# Altium PCB DnDBopIt.PcbDoc
Units mil, origin at the board's own origin, x right, y up, seen from the top; angles counter-clockwise.
Board outline 2935 x 2635 mil, 2 copper layers (Top Layer, Bottom Layer); 33 components, 35 nets, 131 pads, 0 vias.
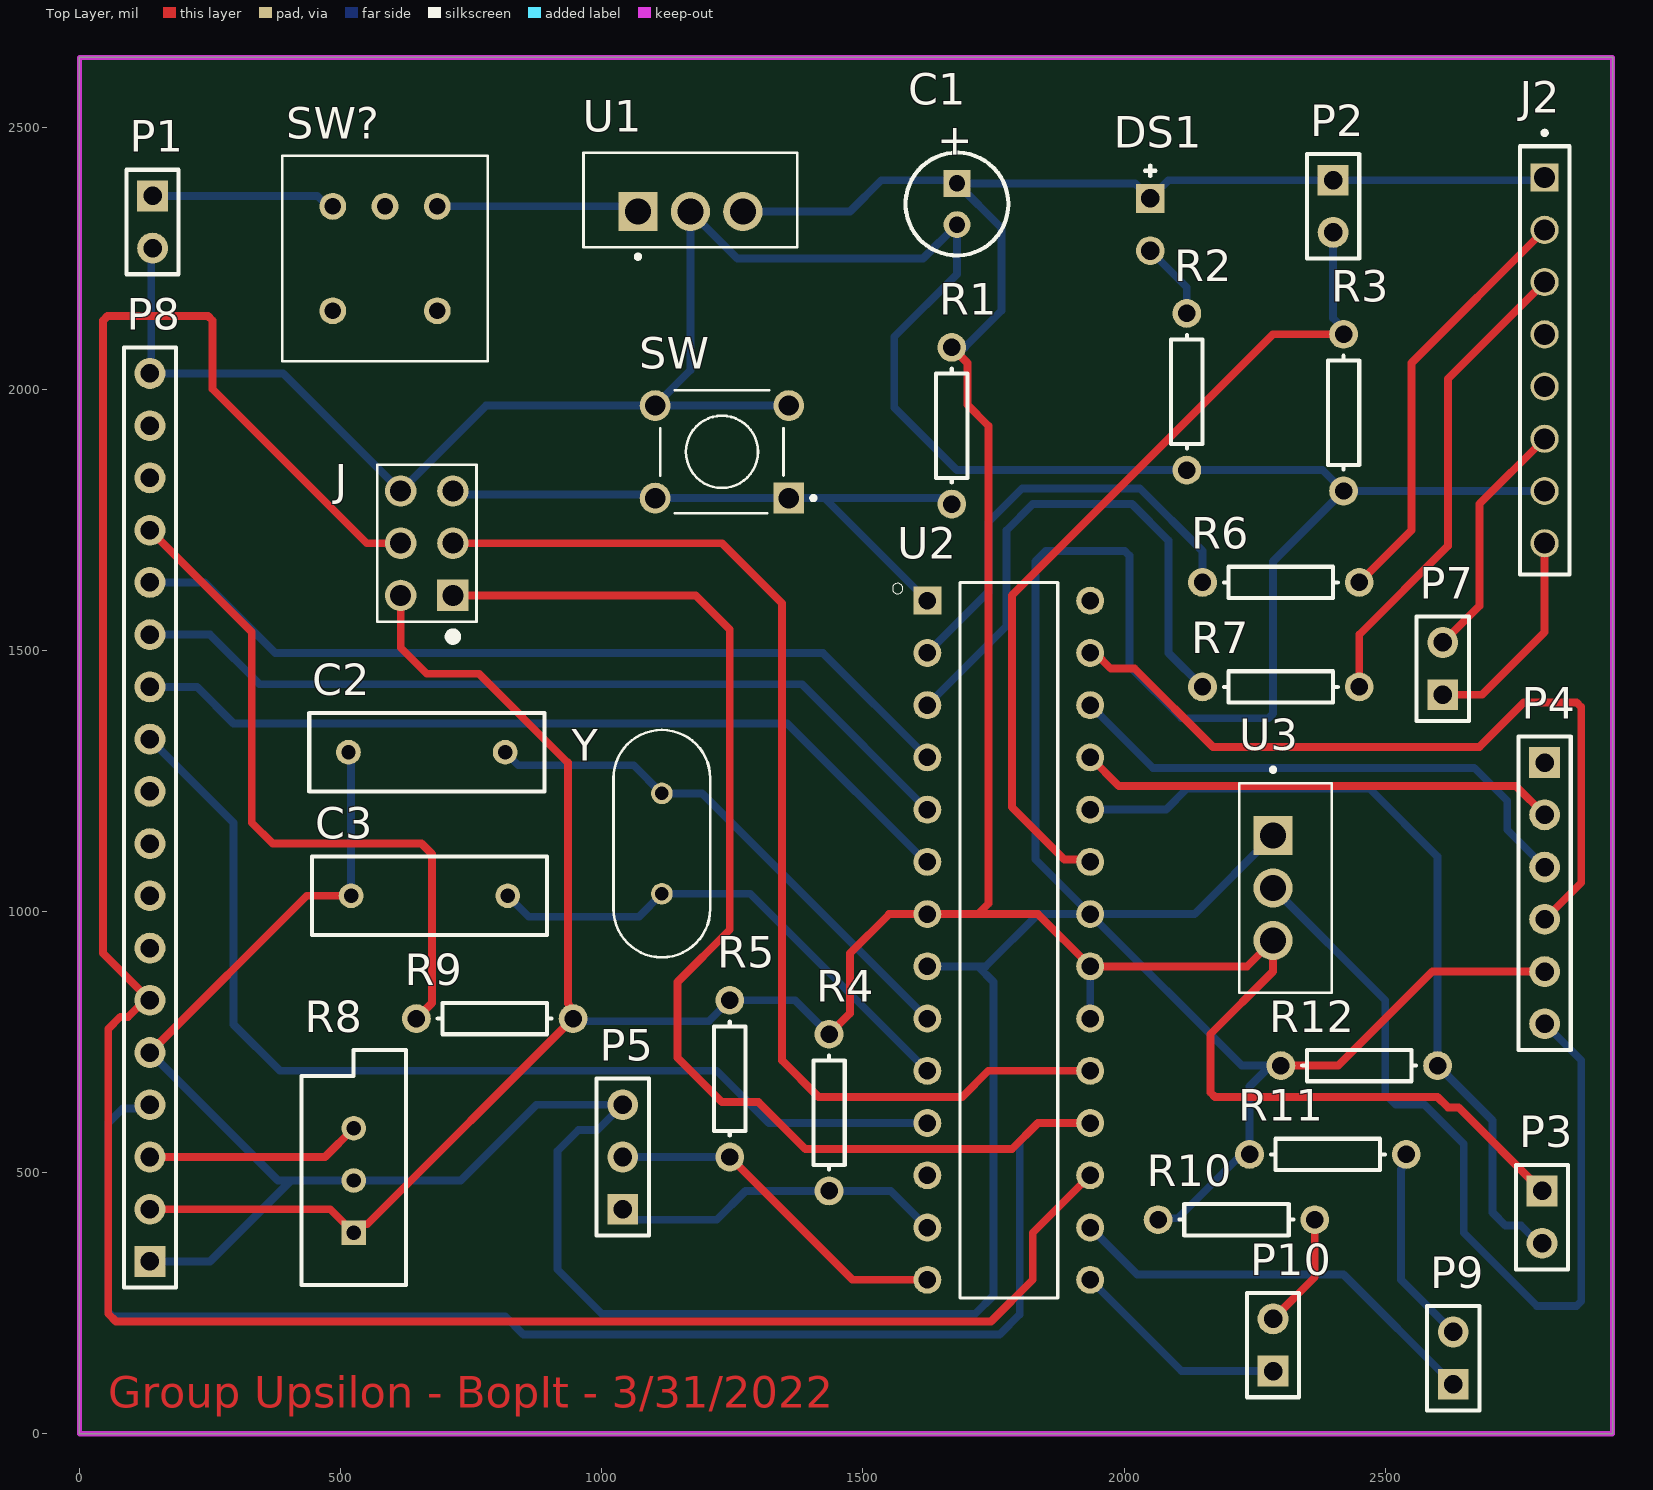
[diagram p0: Top Layer view]
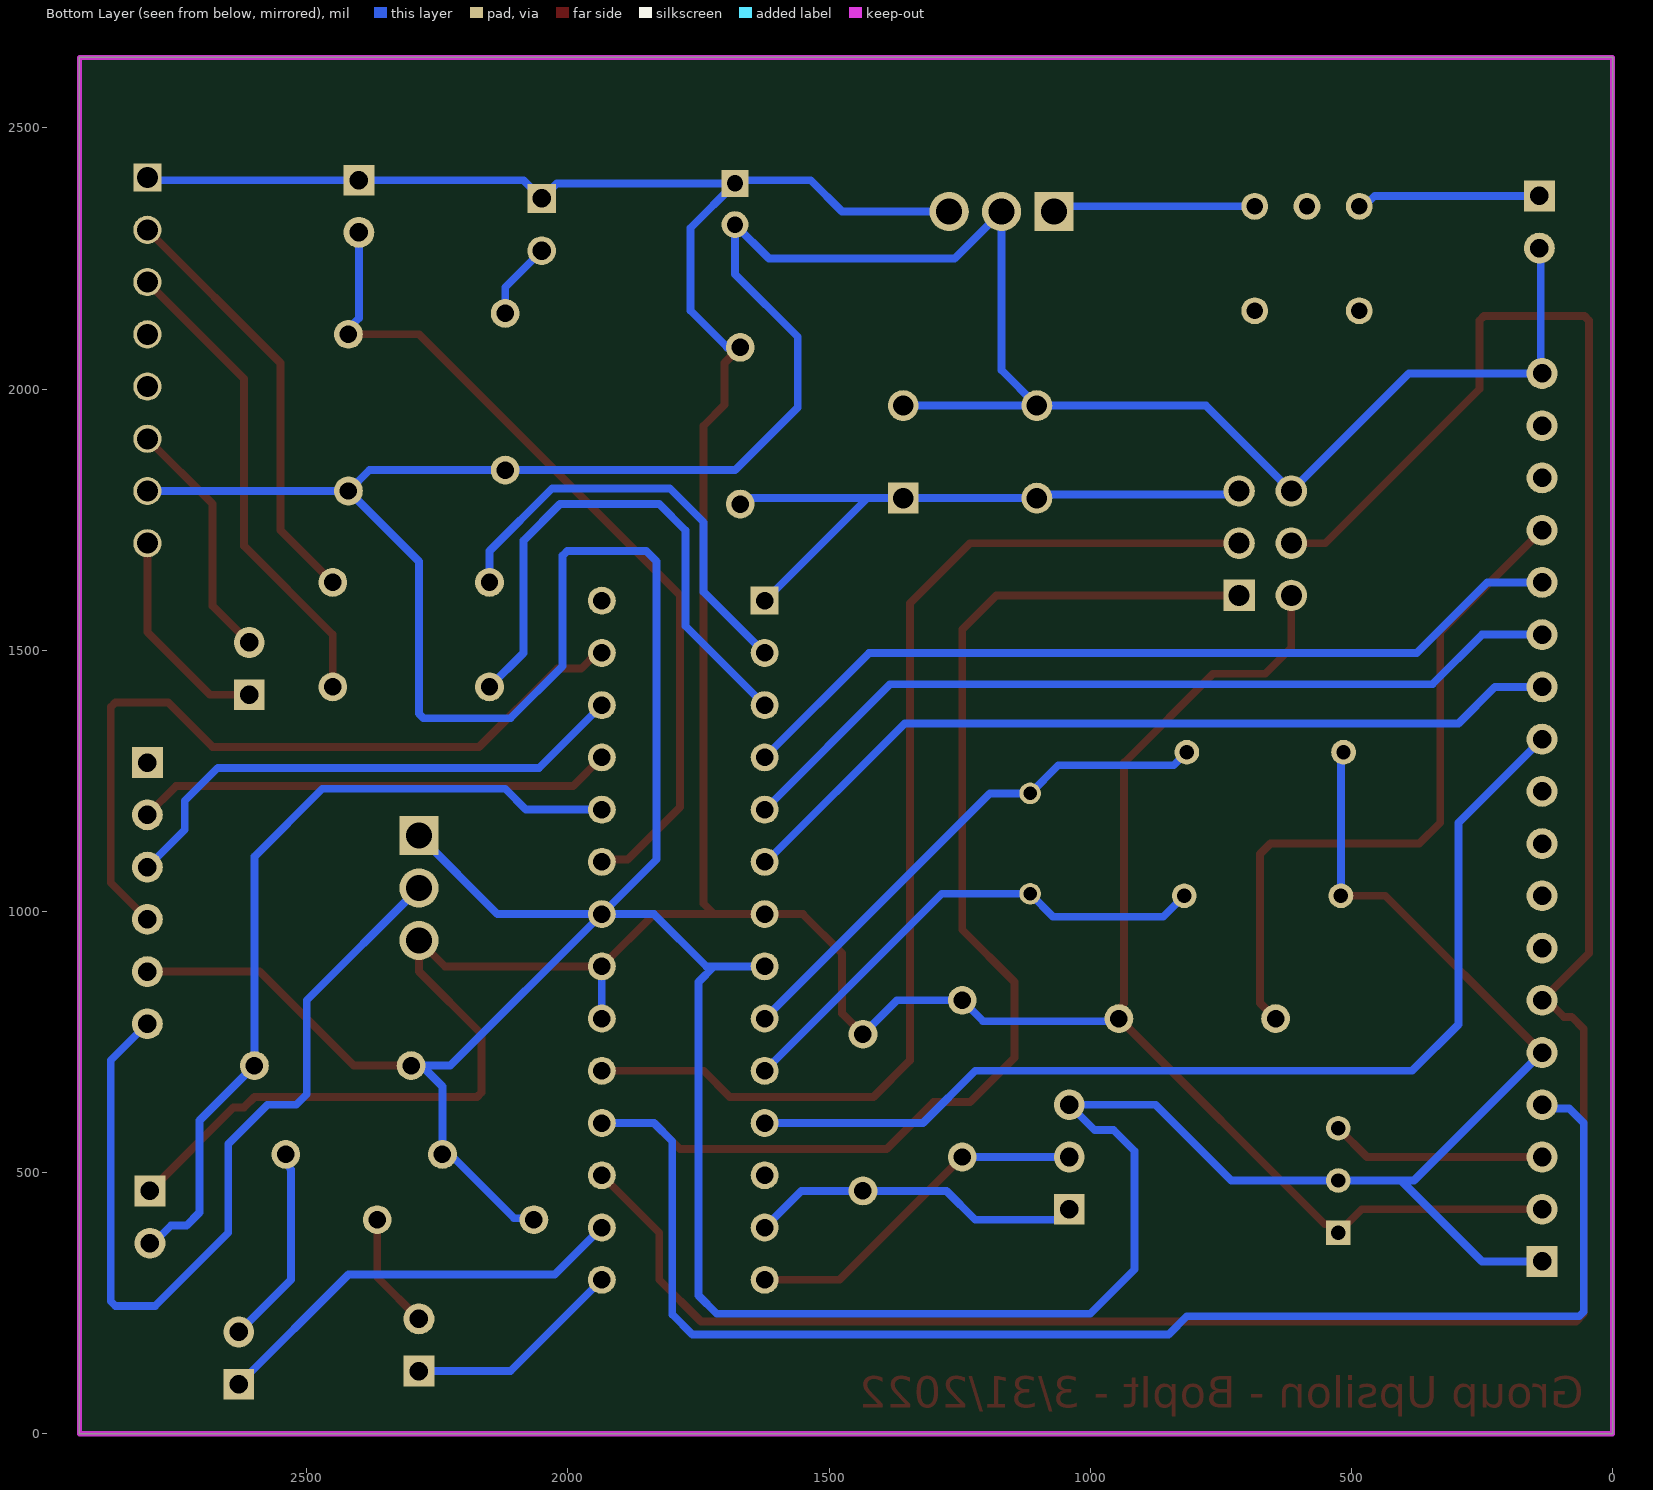
[diagram p1: Bottom Layer view, seen from below]

## Layer stack, top to bottom
Top Solder: solder mask 0.4, Solder Resist, Dk 3.5
Top Layer: signal copper 1.4
Dielectric 1: dielectric 12.6, FR-4, Dk 4.8
Bottom Layer: signal copper 1.4
Bottom Solder: solder mask 0.4, Solder Resist, Dk 3.5

## Board outline
0,0 2935,0 2935,2635 0,2635

## Design rules (kind name [scope] priority, off if disabled: settings)
BoardOutlineClearance [All] p1: gap=7.87 ignorepadtopadclearanceinfootprint=FALSE except(15.75: Arc-SplitBarrior Arc-SplitContinuation Track-SplitBarrior Track-SplitContinuation SMDPad-SplitBarrior SMDPad-SplitContinuation THPad-SplitBarrior THPad-SplitContinuation Via-SplitBarrior Via-SplitContinuation Fill-SplitBarrior Fill-SplitContinuation Poly-SplitBarrior Poly-SplitContinuation Region-SplitBarrior Region-SplitContinuation Text-SplitBarrior Text-SplitContinuation)
Clearance "Clearance Bottom Layer" [OnLayer('Bottom Layer')] p1: gap=8 ignorepadtopadclearanceinfootprint=TRUE except(10: Arc-Text Track-Text SMDPad-Text THPad-Text Via-Text Fill-Text Poly-Text Region-Text Text-Text)
Clearance "Clearance Top Layer" [OnLayer('Top Layer')] p2: gap=8 ignorepadtopadclearanceinfootprint=TRUE except(10: Arc-Text Track-Text SMDPad-Text THPad-Text Via-Text Fill-Text Poly-Text Region-Text Text-Text)
Clearance [All] p3: gap=7.87 ignorepadtopadclearanceinfootprint=FALSE except(3.5: Arc-Arc Arc-Track Arc-SMDPad Track-Track Track-SMDPad SMDPad-SMDPad; 5: Arc-Via Track-Via SMDPad-Via THPad-Via Via-Via; 10: Arc-Text Track-Text SMDPad-Text THPad-Text Via-Text Fill-Text Poly-Text Region-Text Text-Text)
HoleSize [All] p1: absolutevalues=TRUE maxlimit=248.03 minlimit=7.87 maxpercent=80.000 minpercent=20.000
MinimumAnnularRing [All] p1: minimumring=3
MinimumSolderMaskSliver [All] p1: minsoldermaskwidth=3.94
PolygonConnect PolygonConnect_1 [All] p1: thpad.connectstyle=Relief thpad.reliefconductorwidth=20 thpad.reliefentries=4 thpad.polygonreliefangle="90 Angle" thpad.airgapwidth=10 smdpad.connectstyle=Relief smdpad.reliefconductorwidth=20 smdpad.reliefentries=4 smdpad.polygonreliefangle="90 Angle" smdpad.airgapwidth=10 via.connectstyle=Direct via.reliefconductorwidth=20 via.reliefentries=4 via.polygonreliefangle="90 Angle" via.airgapwidth=10
RoutingCorners [All] p1: cornerstyle=Round minsetback=100 maxsetback=100
RoutingVias [All] p1: holewidth=19.68 width=39.37 viastyle="Through Hole" minholewidth=7.87 minwidth=17.72 maxholewidth=39.37 maxwidth=78.74
SilkToSilkClearance [All] p1: silktosilkclearance=3.94
SilkToSolderMaskClearance [IsPad] p1: minsilkscreentomaskgap=3.94 clearancetoexposedcopper=TRUE
SolderMaskExpansion [All] p1: expansion=4 istentingtop=FALSE
Width [All] p1: maxlimit=100 minlimit=3.5 preferedwidth=15
25 further rules are at their usual default settings.

## Components (designator, comment, footprint, x,y, rotation, side; value= is the part's Value field where it differs from the comment)
C1 "ECA1HM100" CAPPR55-200-1100X500X1200 1680,2354.37 r270 top value=10µF
C2 "" RAD-0.3 665,1305 r0 top value=22pF
C3 "" RAD-0.3 670,1030 r0 top value=22pF
DS1 "LTL-1CHG" LTST-LTL-1CHG-2 2050,2315 r270 top
J "67997-206HLF" FRAMATOME_67997-206HLF 665,1705 r90 top
J2 "ESQ-108-12-G-S" SAMTEC_ESQ-108-12-G-S 2805,2405 r270 top
P1 "Header 2" HDR1X2 140,2370 r270 top
P2 "Header 2" HDR1X2 2400,2400 r270 top
P3 "Header 2" HDR1X2 2800,465 r270 top
P4 "Header 6" HDR1X6 2805,1285 r270 top
P5 "Header 3" HDR1X3 1040,430 r90 top
P7 "Header 2" HDR1X2 2610,1415 r90 top
P8 "Header 18" HDR1X18 135,330 r90 top
P9 "Header 2" HDR1X2 2630,95 r90 top
P10 "Header 2" HDR1X2 2285,120 r90 top
R1 "Res1" AXIAL-0.3 1670,1930 r90 top value=10K
R2 "Res1" AXIAL-0.3 2120,1995 r270 top value=220
R3 "Res1" AXIAL-0.3 2420,1955 r270 top value=220
R4 "Res1" AXIAL-0.3 1435,615 r90 top value=10K
R5 "Res1" AXIAL-0.3 1245,680 r90 top value=10K
R6 "Res1" AXIAL-0.3 2300,1630 r0 top value=1K
R7 "Res1" AXIAL-0.3 2300,1430 r0 top value=1K
R8 "RPot" VR5 525,485 r90 top value=10K
R9 "Res1" AXIAL-0.3 795,795 r0 top value=220
R10 "Res1" AXIAL-0.3 2215,410 r0 top value=220
R11 "Res1" AXIAL-0.3 2390,535 r0 top value=220
R12 "Res1" AXIAL-0.3 2450,705 r0 top value=220
SW "" SW_1825910-6-4 1230,1880 r180 top
SW? "AS11CH" AS11CH 585,2250 r0 top
U1 "L7805CV" TO255P1040X460X1968-3 1069.21,2340 r0 top
U2 "ATMEGA328P-PU" DIP794W46P254L2967H457Q28B 1779.09,945 r0 top
U3 "LD1117AV33" TO255P1020X450X1968-3 2285,1145.39 r270 top
Y "LFXT" HC49P488W45L1105T470H410 1115,1130 r270 top

## Footprints (in the part's own frame and the unit in brackets; to place one, negate y for a bottom-side part, rotate by r counter-clockwise, add the part's x,y. Pads: shape width x height; smd on the part's side, far side on the other; paste and mask are expansions set on the pad)
AS11CH [mm]
  round 1.308 hole 0.8: 1(-2.54,2.54) 2(0,2.54) 3(2.54,2.54) M1(-2.54,-2.54) M2(2.54,-2.54)
  silkscreen extent -5,-5 5,5
AXIAL-0.3 [mm] "Axial Device, Thru-Hole; 2 Leads; 0.3 in Pin Spacing"
  round 1.4 hole 0.85: 1(-3.81,0) 2(3.81,0)
  silkscreen extent -2.77,-0.76 2.77,0.76
CAPPR55-200-1100X500X1200 [mm] "THD, 2-Leads, Dia 5mm, Pin Spacing 2mm"
  rect 1.3x1.3 hole 0.8: 1(-1,0)
  round 1.3 hole 0.8: 2(1,0)
  silkscreen extent -2.5,-2.5 2.5,2.5, body extent -2.5,-2.5 2.45,2.5, height 12
DIP794W46P254L2967H457Q28B [mm]
  rect 1.358x1.358 hole 0.85: 1(-3.96,16.51)
  round 1.358 hole 0.85: 2(-3.96,13.97) 3(-3.96,11.43) 4(-3.96,8.89) 5(-3.96,6.35) 6(-3.96,3.81) 7(-3.96,1.27) 8(-3.96,-1.27) 9(-3.96,-3.81) 10(-3.96,-6.35) 11(-3.96,-8.89) 12(-3.96,-11.43) 13(-3.96,-13.97) 14(-3.96,-16.51) 15(3.96,-16.51) 16(3.96,-13.97) 17(3.96,-11.43) 18(3.96,-8.89) 19(3.96,-6.35) 20(3.96,-3.81) 21(3.96,-1.27) 22(3.96,1.27) 23(3.96,3.81) 24(3.96,6.35) 25(3.96,8.89) 26(3.96,11.43) 27(3.96,13.97) 28(3.96,16.51)
  silkscreen extent -5.65,-17.4 2.38,17.4
FRAMATOME_67997-206HLF [mm]
  rect 1.53x1.53 hole 1.02: 1(-2.54,-1.27)
  round 1.53 hole 1.02: 2(-2.54,1.27) 3(0,-1.27) 4(0,1.27) 5(2.54,-1.27) 6(2.54,1.27)
  silkscreen extent -4.74,-2.41 3.81,2.41
HC49P488W45L1105T470H410 [mm]
  round 1.05 hole 0.65: 1(-2.44,0) 2(2.44,0)
  silkscreen extent -5.53,-2.35 5.53,2.35
HDR1X2 [mm] "Connector; Header; 2 Position"
  rect 1.5x1.5 hole 0.9: 1(0,0)
  round 1.5 hole 0.9: 2(2.54,0)
  silkscreen extent -1.27,-1.27 3.81,1.27
HDR1X3 [mm] "Connector; Header; 3 Position"
  rect 1.5x1.5 hole 0.9: 1(0,0)
  round 1.5 hole 0.9: 2(2.54,0) 3(5.08,0)
  silkscreen extent -1.27,-1.27 6.35,1.27
HDR1X6 [mm] "Connector; Header; 6 Position"
  rect 1.5x1.5 hole 0.9: 1(0,0)
  round 1.5 hole 0.9: 2(2.54,0) 3(5.08,0) 4(7.62,0) 5(10.16,0) 6(12.7,0)
  silkscreen extent -1.27,-1.27 13.97,1.27
HDR1X18 [mm] "Connector; Header; 18 Position"
  rect 1.5x1.5 hole 0.9: 1(0,0)
  round 1.5 hole 0.9: 2(2.54,0) 3(5.08,0) 4(7.62,0) 5(10.16,0) 6(12.7,0) 7(15.24,0) 8(17.78,0) 9(20.32,0) 10(22.86,0) 11(25.4,0) 12(27.94,0) 13(30.48,0) 14(33.02,0) 15(35.56,0) 16(38.1,0) 17(40.64,0) 18(43.18,0)
  silkscreen extent -1.27,-1.27 44.45,1.27
LTST-LTL-1CHG-2 [mm] "TH, 2-Leads, Dia 3.8mm"
  rect 1.4x1.4 hole 0.9: 1(-1.27,0)
  round 1.4 hole 0.9: 2(1.27,0)
  silkscreen extent -2.87,-0.25 -2.37,0.25, body extent -1.9,-1.9 1.9,1.9, height 6.5
RAD-0.3 [mm] "Radial Cap, Thru-Hole; 2 Leads; 0.3 in Pin Spacing"
  round 1.2 hole 0.7: 1(-3.81,0) 2(3.81,0)
  silkscreen extent -5.71,-1.91 5.71,1.91
SAMTEC_ESQ-108-12-G-S [mm]
  rect 1.37x1.37 hole 1.02: 01(0,0)
  round 1.37 hole 1.02: 02(2.54,0) 03(5.08,0) 04(7.62,0) 05(10.16,0) 06(12.7,0) 07(15.24,0) 08(17.78,0)
  silkscreen extent -2.27,-1.2 19.31,1.2
SW_1825910-6-4 [mm]
  rect 1.498x1.498 hole 0.99: 1(-3.25,2.25)
  round 1.498 hole 0.99: 2(3.25,2.25) 3(-3.25,-2.25) 4(3.25,-2.25)
  silkscreen extent -4.54,-3 3,3
TO255P1020X450X1968-3 [mm]
  rect 1.91x1.91 hole 1.27: 1(0,0)
  round 1.91 hole 1.27: 2(2.55,0) 3(5.1,0)
  silkscreen extent -3.3,-1.64 7.65,2.86
TO255P1040X460X1968-3 [mm]
  rect 1.91x1.91 hole 1.27: 1(0,0)
  round 1.91 hole 1.27: 2(2.55,0) 3(5.1,0)
  silkscreen extent -2.65,-2.29 7.75,2.86
VR5 [mm] "Thru-Hole; 3 Leads"
  rect 1.2x1.2 hole 0.7: 1(-2.54,0)
  round 1.2 hole 0.7: 2(0,0) 3(2.54,0)
  silkscreen extent -5.08,-2.54 6.35,2.54

## Part data
C1: library part CMP-001-00025-5, "Aluminum Electrolytic Capacitor, 10 uF, +/- 20%, 50 V, -40 to 85 degC, 2-Pin THD, RoHS, Bulk", Capacitor Type=Electrolytic, Case/Package=Radial, Manufacturer=Panasonic, Max Operating Temperature=85°C, Min Operating Temperature=-40°C, Package Description="2-Pin Radial Lead, Dia 5 mm, Height 12 mm", Package Quantity=200, Package Reference=CAPPR55-200-1100X500X1200, Ripple Current=65mA, Tolerance=20%, Voltage Rating=50V, Datasheet URL=https://industrial.panasonic.com/cdbs/www-data/pdf/RDF0000/ABA0000C1218.pdf, Datasheet Version="Rev. 05, 10/2016", Diameter=5mm, Lead Pitch=2mm, Manufacturer URL=http://www.panasonic.com/, Mounting Technology=TH, Packaging=Bulk, Pins=2, Ripple Current (AC)=65mA, RoHS Compliant=True
C2 C3: library part Cap, "Capacitor", LatestRevisionDate=17-Jul-2002, LatestRevisionNote="Re-released for DXP Platform.", PackageDescription="Radial Cap, Thru-Hole; 2 Leads; 0.3 in Pin Spacing", PackageReference=RAD-0.3, Published=8-Jun-2000, Publisher="Altium Limited"
DS1: library part CMP-007-00019-1, "LED Uni-Color Green, 100 mW, 30 mA, -55 to 100 degC, 2-Pin THD, RoHS, Bulk", Case/Package=Radial, Colour=Green, Forward Current=30mA, Forward Voltage=2.6V, Manufacturer=Lite-On, Max Operating Temperature=100°C, Min Operating Temperature=-55°C, Package Description="2-Pin Through Hole Device, Dia 3.8 mm", Package Quantity=1000, Power=100mW, Datasheet URL=http://datasheet.octopart.com/LTL-1CHG-Lite-On-datasheet-143841.pdf, Datasheet Version=Mar-00, Illumination Colour=Green, Lens Style=Dome, Luminous Intensity=12.6mcd, Manufacturer URL=http://www.us.liteon.com/, Mounting Technology=TH, Nominal Vf=2.1V, Package Reference=LTL-1CHG, Packaging=Bulk, Pins=2, RoHS Compliant=True, Viewing Angle=60degrees
J: "Connector Header Through Hole 6 position 0.100 _2.54mm_", Package=None, Digi-Key_Part_Number=609-3234-ND, Digi-Key_Purchase_URL=https://www.digikey.com/product-detail/en/amphenol-icc-fci/67997-206HLF/609-3234-ND/1878491?utm_source=snapeda&utm_medium=aggregator&utm_campaign=symbol, MF="Amphenol ICC", MP=67997-206HLF, SnapEDA_Link=https://www.snapeda.com/parts/67997-206HLF/Amphenol%20FCI/view-part/103429/?ref=snap
J2: Package=None, Availability=Unavailable, MP=ESQ-108-12-G-S, Price=None
P1 P2 P3 P7 P9 P10: "Header, 2-Pin", LatestRevisionDate=17-Jul-2002, LatestRevisionNote="Re-released for DXP Platform.", Publisher="Altium Limited"
P4: "Header, 6-Pin", LatestRevisionDate=17-Jul-2002, LatestRevisionNote="Re-released for DXP Platform.", Publisher="Altium Limited"
P5: "Header, 3-Pin", LatestRevisionDate=17-Jul-2002, LatestRevisionNote="Re-released for DXP Platform.", Publisher="Altium Limited"
P8: "Header, 18-Pin", LatestRevisionDate=17-Jul-2002, LatestRevisionNote="Re-released for DXP Platform.", Publisher="Altium Limited"
R1 R2 R3 R4 R5 R6 R7 R9 R10 R11 R12: "Resistor", LatestRevisionDate=17-Jul-2002, LatestRevisionNote="Re-released for DXP Platform.", PackageDescription="Axial Device, Thru-Hole; 2 Leads; 0.3 in Pin Spacing", PackageReference=AXIAL-0.3, Published=8-Jun-2000, Publisher="Altium Limited"
R8: "Potentiometer", LatestRevisionDate=17-Jul-2002, LatestRevisionNote="Re-released for DXP Platform.", PackageDescription="Variable Resistor, Thru-Hole; 3 Leads", PackageReference=VR5, Published=8-Jun-2000, Publisher="Altium Limited", Set Position=0.5, Sim Note="Enter the Resistance value and the set point into parameter fields."
SW: library part 1825910-6, "Switch Push Button OFF _ON_ SPST Round Button 0.05A 24VDC Momentary Contact PC Pins Thru-Hole", Contact_Current_Rating="50 mA", Package=None, Configuration_Pole-Throw="Single Pole - Single Throw", Digi-Key_Part_Number=450-1650-ND, Digi-Key_Purchase_URL=https://www.digikey.com/product-detail/en/te-connectivity-alcoswitch-switches/1825910-6/450-1650-ND/1632536?utm_source=snapeda&utm_medium=aggregator&utm_campaign=symbol, EU_RoHS_Compliance=Compliant, MF="TE Connectivity", MP=1825910-6, SnapEDA_Link=https://www.snapeda.com/parts/1825910-6/TE%20Connectivity%20ALCOSWITCH%20Switches/view-part/424522/?ref=snap, TE_purchase_URL=https://www.te.com/usa-en/product-1825910-6.html?te_bu=Cor&te_type=disp&te_campaign=seda_glo_cor-seda-global-disp-prtnr-fy19-seda-model-bom-cta_sma-317_1&elqCampaignId=32493
SW?: "Slide Switch SPST Through Hole, Right Angle", Package=None, Availability=Warning, Check_prices=https://www.snapeda.com/parts/AS11CH/NKK%20Switches/view-part/343697/?ref=eda, MF="NKK Switches", MP=AS11CH, Price=None, Purchase-URL=https://pricing.snapeda.com/search/part/AS11CH/?ref=eda, SnapEDA_Link=https://www.snapeda.com/parts/AS11CH/NKK%20Switches/view-part/343697/?ref=snap
U1: "Linear Voltage Regulator IC 1 Output 1.5A TO-220AB", Package="TO-220 STMicroelectronics", Availability=Unavailable, MF=STMicroelectronics, MP=L7805CV, Price=None, SnapEDA_Link=https://www.snapeda.com/parts/L7805CV/STMicroelectronics/view-part/501150/?ref=snap
U2: "AVR AVRÂ® ATmega Microcontroller IC 8-Bit 20MHz 32KB _16K x 16_ FLASH 28-PDIP", Package="PDIP-28 Atmel", Availability=Unavailable, MF=Microchip, MP=ATMEGA328P-PU, Price=None, SnapEDA_Link=https://www.snapeda.com/parts/ATMEGA328P-PU/Microchip/view-part/44282/?ref=snap
U3: "Linear Voltage Regulator IC 1 Output 1A TO-220AB", Package="TO-220 STMicroelectronics", Availability=Unavailable, MF=STMicroelectronics, MP=LD1117AV33, Price=None, SnapEDA_Link=https://www.snapeda.com/parts/LD1117AV33/STMicroelectronics/view-part/486946/?ref=snap
Y: library part LFXTAL003240BULK, "16MHz Â±30ppm Crystal 30pF 40 Ohms HC-49/US", Package="HC-49/US IQD Frequency Products", Availability=Unavailable, MF="IQD Frequency Products", MP=LFXTAL003240BULK, Price=None, SnapEDA_Link=https://www.snapeda.com/parts/LFXTAL003240BULK/IQD%20Frequency%20Products/view-part/2463585/?ref=snap

## Nets (pads, with @x,y where several pads share a name; then routed paths per layer and width w, separated by ;. In a path a pad name is that pad's centre, name@x,y a point inside that pad or via, vN(x,y) a via of type N, cw(c..) or ccw(c..) an arc to the next point about the centre after c; other vN are vias at no path point)
GND: C1.2 C2.1 C3.1 J2.07 J.6 P1.2 P4.5 P5.3 P8.1 P8.5 P8.18 R2.2 R3.2 R8.2 R10.1 R11.1 R12.1 SW.3 SW.4 U1.2 U2.8 U2.22 U3.1 | length 12578.5
  Top Layer w15: P8.5 435,1030 C3.1 ; R12.1 2410,705 2590,885 P4.5
  Bottom Layer w15: P8.1 250,330 405,485 ; P8.5 380,485 405,485 ; P1.2 137.5,2267.5 137.5,2032.5 P8.18 390,2030 J.6 778.58,1968.58 SW.4 ; C3.1 C2.1@520,1305 ; SW.3 SW.4 ; U2.8 1720,895 ; R10.1 2067.9,412.9 2102.9,412.9 2217.32,527.32 2232.32,527.32 R11.1 2240,665 R12.1@2280,705 ; U3.1 2134.61,995 U2.22 ; R12.1 R12.1@2280,705 ; J2.07 R3.2 ; 405,485 R8.2 730,485 875,630 P5.3 991.39,581.39 955.18,581.39 915,541.21 915,315 1000,230 1715,230 1750,265 1750,865 1720,895 ; SW.4 1169.61,2036.14 U1.2 1259.61,2250 1615,2250 C1.2 1680,2220 1560,2100 1560,1965 1680,1845 1770,1845 1800,1845 R2.2 2380,1845 R3.2 ; 1720,895 1735,895 1835,995 U2.22 ; U2.22 2225,705 R12.1@2280,705 ; U2.22 1830,1100 1830,1670 1850,1690 2001.21,1690 2010,1681.21 2010,1470 2110,1370 2276.21,1370 2285,1378.79 2285,1670 R3.2
NetC1_1: C1.1 DS1.1 J2.01 J.2 P2.1 P3.1 P8.2 R1.2 R4.2 R5.2 R8.1 R9.2 U1.3 U2.7 U2.20 U2.21 U3.3 | length 7881.7
  Top Layer w15: P8.2 480,430 R8.1 541.12,401.12 551.12,401.12 R9.2 937.32,802.68 937.32,821.52 935,823.85 935,1285 765,1455 665,1455 615,1505 J.2 ; R4.2 1475,805 1475,920 1550,995 U2.7 1720,995 ; R1.2 1700,2050 1700,1970 1740,1930 1740,1015 1720,995 ; P3.1 2640,625 2620,625 2600,645 2173.79,645 2165,653.79 2165,765 2285,885 U3.3 2235.39,895 U2.21 1835,995 1720,995
  Bottom Layer w15: R9.2@945,790 1205,790 R5.2 1370,830 R4.2 ; U1.3 1475,2340 1535,2400 1673.74,2400 C1.1 ; R1.2 1695,2080 1765,2150 1765,2308.74 C1.1 ; U2.20 U2.21 ; J2.01 2800,2400 2085,2400 DS1.1 2021.26,2393.74 C1.1
NetC2_2: C2.2 U2.9 Y.1 | length 1019.4
  Bottom Layer w15: C2.2 840,1280 1061.06,1280 Y.1 1192.13,1226.06 U2.9
NetC3_2: C3.2 U2.10 Y.2 | length 978.3
  Bottom Layer w15: C3.2 860,990 1071.06,990 Y.2 1284.25,1033.94 U2.10
NetDS1_2: DS1.2 R2.1 | length 149
  Bottom Layer w15: DS1.2 2119.94,2195.06 2119.94,2145.06 R2.1
NetJ2_02: J2.02 R6.2 | length 822
  Top Layer w15: R6.2 2550,1730 2550,2050 J2.02
NetJ2_03: J2.03 R7.2 | length 922
  Top Layer w15: R7.2 2450,1530 2620,1700 2620,2020 J2.03
NetJ2_06: J2.06 P7.2 | length 470.8
  Top Layer w15: P7.2 2680,1585 2680,1780 J2.06
NetJ2_08: J2.08 P7.1 | length 414.7
  Top Layer w15: P7.1 2685,1415 2805,1535 J2.08
NetJ_1: J.1 P8.4 U2.18 | length 5017.2
  Top Layer w15: J.1 1180,1605 1245,1540 1245,965 1145,865 1145,720 1230,635 1300,635 1390,545 1785,545 1835,595 U2.18
  Bottom Layer w15: P8.4 127.97,622.97 82.97,622.97 55,595 55,233.79 63.79,225 815,225 850,190 1761.21,190 1800,228.79 1800,560 1835,595 U2.18
NetJ_3: J.3 U2.19 | length 2192.3
  Top Layer w15: J.3 1230,1705 1345,1590 1345,715 1415,645 1690,645 1740,695 U2.19
NetJ_4: J.4 P8.6 U2.17 | length 4871.9
  Top Layer w15: J.4 550,1705 255,2000 255,2131.21 246.21,2140 53.79,2140 45,2131.21 45,920 P8.6 124.85,830 93.14,798.29 78.29,798.29 55,775 55,230 70,215 1745,215 1825,295 1825,385 U2.17
NetJ_5: J.5 R1.1 SW.1 SW.2 U2.1 | length 1243.1
  Bottom Layer w15: J.5 721.79,1798.21 1095.26,1798.21 SW.2 SW.1 1426.77,1791.42 ; U2.1 1426.77,1791.42 ; R1.1 1658.58,1791.42 1426.77,1791.42
NetP1_1: P1.1 SW?.1 | length 353.3
  Bottom Layer w15: P1.1 455.12,2370 475.12,2350 SW?.1
NetP2_2: P2.2 R3.1 U2.23 | length 1643.9
  Top Layer w15: U2.23 1930.77,1099.23 1885.77,1099.23 1785,1200 1785,1605 2285,2105 R3.1
  Bottom Layer w15: P2.2 2400,2135.86 2420,2115.86 R3.1
NetP3_2: P3.2 R12.2 U2.24 | length 1579.5
  Bottom Layer w15: U2.24 2080,1195 2120,1235 2470,1235 2600,1105 2600,720 R12.2 2705,600 2705,423.79 2730.18,398.61 2760.03,398.61 2793.64,365 P3.2
NetP4_2: P4.2 U2.25 | length 915.6
  Top Layer w15: U2.25 1990,1240 2750,1240 P4.2
NetP4_3: P4.3 U2.26 | length 1030.6
  Bottom Layer w15: U2.26 2055,1275 2670,1275 2733.29,1211.71 2733.29,1156.71 P4.3
NetP4_4: P4.4 U2.27 | length 1488.6
  Top Layer w15: U2.27 1944.62,1495 1974.62,1465 2020,1465 2170,1315 2680,1315 2765,1400 2866.21,1400 2875,1391.21 2875,1055 P4.4
NetP4_6: P4.6 U3.2 | length 1690.2
  Bottom Layer w15: U3.2 2500,830 2500,650 2520,630 2575,630 2650,555 2650,385 2790,245 2866.21,245 2875,253.79 2875,715 P4.6
NetP5_1: P5.1 R4.1 U2.13 | length 643.2
  Bottom Layer w15: P5.1 1060,410 1220,410 1275,465 R4.1 1553.19,465 U2.13
NetP5_2: P5.2 R5.1 U2.14 | length 680.5
  Top Layer w15: R5.1 1480,295 U2.14
  Bottom Layer w15: P5.2 R5.1
NetP8_3: P8.3 R8.3 | length 412.8
  Top Layer w15: P8.3 470,530 R8.3
NetP8_11: P8.11 U2.11 | length 2018.9
  Bottom Layer w15: P8.11 295,1170 295,783.79 383.79,695 1220,695 1320,595 U2.11
NetP8_12: P8.12 U2.6 | length 1627
  Bottom Layer w15: P8.12 225,1430 295,1360 1355,1360 1620,1095 U2.6
NetP8_13: P8.13 U2.5 | length 1627
  Bottom Layer w15: P8.13 250,1530 345,1435 1383.19,1435 U2.5
NetP8_14: P8.14 U2.4 | length 1627
  Bottom Layer w15: P8.14 240,1630 375,1495 1423.19,1495 U2.4
NetP8_15: P8.15 R9.1 | length 1338.1
  Top Layer w15: P8.15 330,1535 330,1170 370,1130 655,1130 675,1110 675,825 R9.1
NetP9_1: P9.1 U2.16 | length 819.3
  Bottom Layer w15: U2.16 2025,305 2420,305 P9.1
NetP9_2: P9.2 R11.2 | length 385.6
  Bottom Layer w15: R11.2 2532.32,527.32 2532.32,508.48 2530,506.15 2530,295 P9.2
NetP10_1: P10.1 U2.15 | length 422.5
  Bottom Layer w15: U2.15 2110,120 P10.1
NetP10_2: P10.2 R10.2 | length 225
  Top Layer w15: P10.2 2365,300 R10.2@2365,411.85
NetR6_1: R6.1 U2.2 | length 845
  Bottom Layer w15: U2.2 1740,1611.81 1740,1745 1805,1810 2030,1810 2150,1690 R6.1
NetR7_1: R7.1 U2.3 | length 1064.5
  Bottom Layer w15: U2.3 1775,1546.81 1775,1730 1825,1780 2015,1780 2085,1710 2085,1495 R7.1
NetSW?_3: SW?.3 U1.1 | length 388.4
  Bottom Layer w15: SW?.3 1059.21,2350 U1.1
pads on no net: J2.04 J2.05 P4.1 P8.7 P8.8 P8.9 P8.10 P8.16 P8.17 SW?.2 SW?.M1 SW?.M2 U2.12 U2.28

## Keep-outs
Keep-Out Layer:
  the board outline again, w10

## Other copper
Top Layer:
  text "Group Upsilon - BopIt - 3/31/2022" at 55,50 h60

## Text inside footprints (layer, text, board x,y; h text height)
C1: Top Overlay "+" at 1650.98,2508.23 h59.06 r270